# Altium PCB EP2C5T144C8.PcbDoc (part 2 of 2)
Units mm, origin at the board's own origin, x right, y up, seen from the top; angles counter-clockwise.
Board outline 85 x 80 mm, 2 copper layers (Top Layer, Bottom Layer); 74 components, 125 nets, 468 pads, 116 vias.
Unrouted connection lines stored in the file: 2.
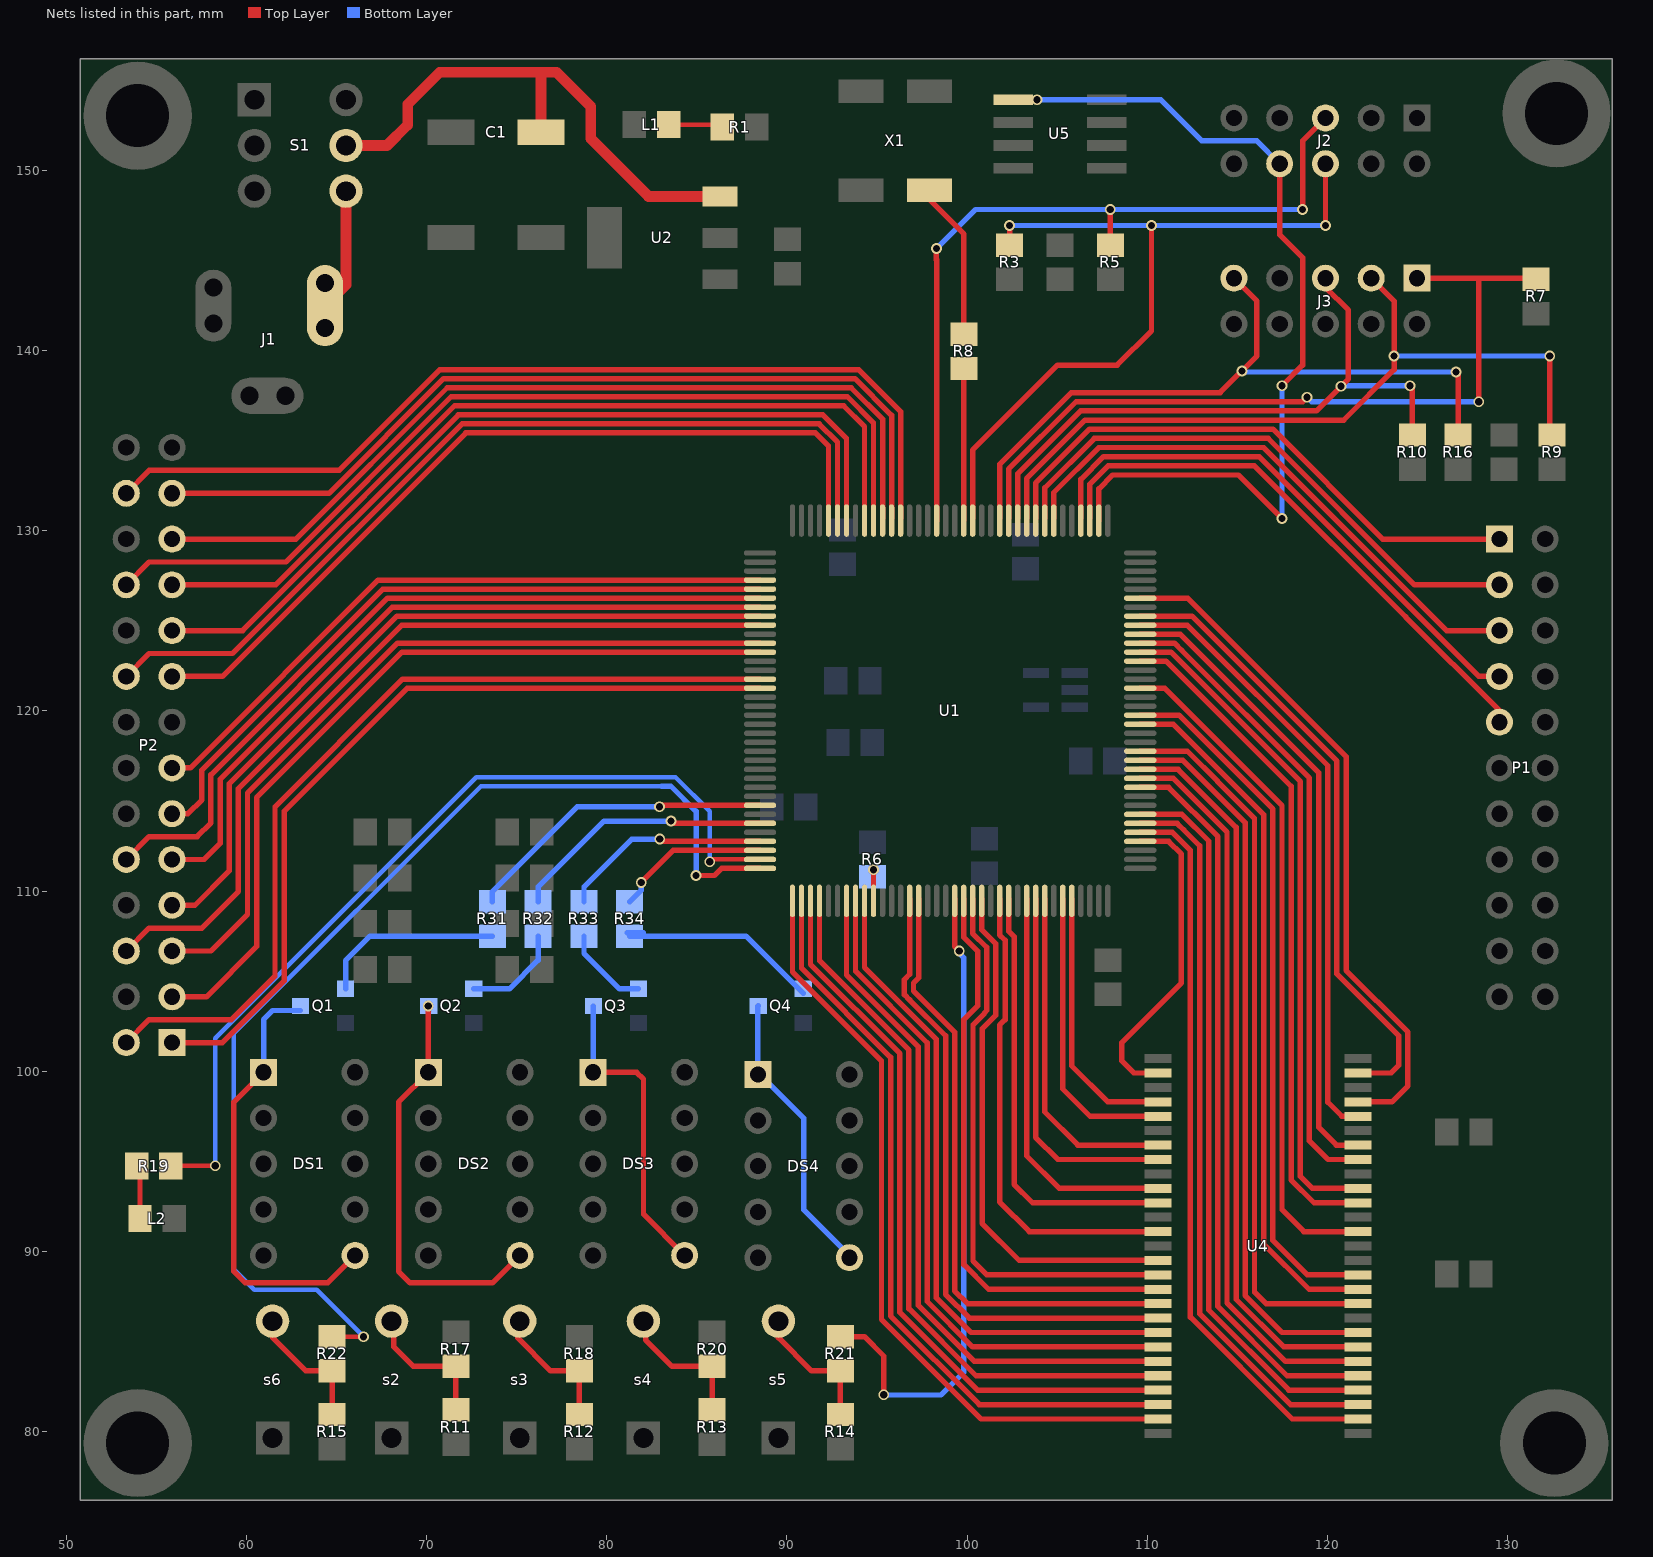
[diagram p2: the nets of this part, all layers, seen from the top]

## Via types
v1: diameter 0.6, hole 0.4, Top Layer to Bottom Layer, 68 vias
v2: diameter 0.8, hole 0.6, Top Layer to Bottom Layer, 35 vias
v3: diameter 1, hole 0.7, Top Layer to Bottom Layer, 4 vias
v4: diameter 2, hole 1.5, Top Layer to Bottom Layer, 3 vias
v5: diameter 0.7, hole 0.5, Top Layer to Bottom Layer, 3 vias
v6: diameter 1.27, hole 0.711, Top Layer to Bottom Layer, 1 vias
v7: diameter 0.8, hole 0.6, Top Layer to Bottom Layer, tented bottom, 1 vias
v8: diameter 1, hole 0.8, Top Layer to Bottom Layer, 1 vias

## Nets (pads, with @x,y where several pads share a name; then routed paths per layer and width w, separated by ;. In a path a pad name is that pad's centre, name@x,y a point inside that pad or via, vN(x,y) a via of type N, cw(c..) or ccw(c..) an arc to the next point about the centre after c; other vN are vias at no path point) (continued)
KEY4: R21.1 U1.91 | length 36.5
  Top Layer w0.3: R21.1@92.964,85.278 94.3,85.278 95.377,84.201 v1(95.377,82.057) ; U1.91@99.31,109.592 99.31,106.938 v1(99.568,106.68)
  Bottom Layer w0.3: v1(95.377,82.057) 95.392,82.042 98.552,82.042 99.822,83.312 99.822,106.299 99.568,106.553 v1(99.568,106.68)
KEY5: R22.1 U1.72 | length 62.8
  Top Layer w0.254: R22.1@64.77,85.278 v1(66.512,85.278)
  Top Layer w0.3: v1(84.963,110.871) 85.979,110.871 86.373,111.265 U1.72@88.51,111.265
  Bottom Layer w0.254: v1(66.512,85.278) 63.906,87.884 60.452,87.884 59.309,89.027 59.309,102.108 73.025,115.824 83.058,115.824
  Bottom Layer w0.3: 83.058,115.824 83.566,115.824 84.963,114.427 v1(84.963,110.871)
LED: R19.1 U1.71 | length 49.4
  Top Layer w0.254: R19.1@55.831,94.759 v1(58.276,94.759) ; v1(85.725,111.633) 85.857,111.765 U1.71@88.51,111.765
  Bottom Layer w0.254: v1(58.276,94.759) 58.276,101.837 72.771,116.332 83.82,116.332 85.725,114.427 v1(85.725,111.633)
NCE: J2.6 R3.1 U1.16 | length 44.3
  Top Layer w0.3: U1.16@100.31,130.692 100.31,134.473 105.029,139.192 108.331,139.192 110.236,141.097 v1(110.236,146.939) ; R3.1@102.362,145.857 v1(102.362,146.939) ; v1(119.888,146.939) J2.6@119.888,150.368
  Bottom Layer w0.3: v1(102.362,146.939) v1(119.888,146.939)
NCONFIG: J2.5 R5.1 U1.20 | length 43.9
  Top Layer w0.3: 98.298,145.034 98.298,145.657 v1(98.31,145.669) ; U1.20@98.31,130.565 98.31,145.034 ; R5.1@107.95,145.857 v1(107.95,147.828) ; v1(118.618,147.828) 118.618,151.638 J2.5@119.888,152.908
  Bottom Layer w0.3: v1(98.31,145.669) 100.469,147.828 v1(118.618,147.828)
NCS: J2.8 U1.2 U5.1 | length 50.2
  Top Layer w0.3: U5.1@102.556,153.924 v1(103.886,153.924) ; U1.2@107.31,130.565 107.31,132.329 108.077,133.096 115.062,133.096 v1(117.475,130.683) ; J2.8@117.348,150.368 117.348,146.431 118.618,145.161 118.618,139.192 v1(117.475,138.049)
  Bottom Layer w0.3: v1(103.886,153.924) 110.744,153.924 113.03,151.638 116.078,151.638 J2.8@117.348,150.368 ; v1(117.475,130.683) v1(117.475,138.049)
NetC1_1: C1.1 S1.5 U2.3@86.281,148.556 | length 29.8
  Top Layer w0.6: S1.5@66.04,151.384 67.818,151.384 68.961,152.527 68.961,153.67 70.739,155.448 77.216,155.448 79.121,153.543 79.121,151.765 82.33,148.556 U2.3@86.281,148.556 ; 76.327,155.448 76.363,155.412 C1.1@76.363,152.121
NetDS1_1: DS1.1 DS1.6 Q1.3 | length 24.5
  Top Layer w0.3: DS1.1@60.96,99.949 59.309,98.298 59.309,88.9 59.944,88.265 64.516,88.265 DS1.6@66.04,89.789
  Bottom Layer w0.3: DS1.1@60.96,99.949 60.96,102.87 61.468,103.378 Q1.3@63.012,103.378
NetDS2_1: DS2.1 DS2.6 Q2.3 | length 23.1
  Top Layer w0.3: v1(70.104,103.632) DS2.1@70.104,99.949 68.453,98.298 68.453,88.9 69.088,88.265 73.66,88.265 DS2.6@75.184,89.789
  Bottom Layer w0.3: Q2.3@70.104,103.358 Q2.3@70.124,103.378
NetDS3_1: DS3.1 DS3.6 Q3.3 | length 17.9
  Top Layer w0.3: DS3.1@79.248,99.949 81.661,99.949 82.042,99.568 82.042,92.075 DS3.6@84.328,89.789 DS3.6@83.812,89.789
  Bottom Layer w0.3: DS3.1@79.248,99.949 Q3.3@79.248,103.612
NetDS4_1: DS4.1 DS4.6 Q4.3 | length 16.1
  Bottom Layer w0.3: DS4.1@88.392,99.822 88.392,103.612 Q4.3@88.412,103.632 ; DS4.1@88.392,99.949 90.932,97.409 90.932,92.329 DS4.6@93.472,89.789
NetJ1_1: J1.1 J1.1A J1.1B S1.4 | length 6.8
  Top Layer w0.6: J1.1@64.373,142.494 65.532,143.653 S1.4@65.532,148.844
NetL1_2: L1.2 R1.2 | length 3
  Top Layer w0.254: L1.2@83.437,152.54 86.286,152.54 R1.2@86.426,152.4
NetL2_1: L2.1 R19.2 | length 3
  Top Layer w0.3: R19.2@53.914,94.742 54.104,94.551 L2.1@54.104,91.834
NetR8_1: R8.1 U1.17 | length 8.4
  Top Layer w0.3: U1.17@99.822,130.577 R8.1@99.822,139.004
NetR8_2: R8.2 X1.3 | length 9
  Top Layer w0.3: X1.3@97.404,148.888 99.822,146.47 R8.2@99.822,140.904
NetR11_2: R11.2 R17.2 s2.2 | length 7.7
  Top Layer w0.3: s2.2@68.193,86.138 68.193,84.715 69.276,83.632 R17.2@71.628,83.632 R11.2@71.628,81.214
NetR12_2: R12.2 R18.2 s3.2 | length 7.5
  Top Layer w0.3: s3.2@75.051,86.138 75.051,85.223 76.896,83.378 R18.2@78.486,83.378 R12.2@78.486,80.96
NetR13_2: R13.2 R20.2 s4.2 | length 7.8
  Top Layer w0.3: s4.2@82.163,86.138 82.163,85.096 83.627,83.632 R20.2@85.852,83.632 R13.2@85.852,81.214
NetR14_2: R14.2 R21.2 s5.2 | length 7.5
  Top Layer w0.3: s5.2@89.529,86.138 89.529,85.223 91.374,83.378 R21.2@92.964,83.378 R14.2@92.964,80.96
NetR15_2: R15.2 R22.2 s6.2 | length 7.4
  Top Layer w0.3: s6.2@61.462,86.138 61.462,85.223 63.307,83.378 R22.2@64.77,83.378 R15.2@64.77,80.96
NSTATUS: R6.1 U1.82 | length 1.6
  Top Layer w0.3: U1.82@94.81,109.592 v1(94.81,111.193)
P1: P2.13 U1.40 | length 36.9
  Top Layer w0.3: P2.13@55.88,116.84 56.896,116.84 67.321,127.265 U1.40@88.51,127.265
P2: P2.11 U1.41 | length 38.8
  Top Layer w0.3: P2.11@55.88,114.3 56.769,114.3 57.531,115.062 57.531,116.713 67.583,126.765 U1.41@88.51,126.765
P3: P2.10 U1.42 | length 42.7
  Top Layer w0.3: P2.10@53.34,111.76 54.61,113.03 57.277,113.03 58.039,113.792 58.039,116.459 67.845,126.265 U1.42@88.51,126.265
P4: P2.9 U1.43 | length 40.5
  Top Layer w0.3: P2.9@55.88,111.76 57.658,111.76 58.547,112.649 58.547,116.205 68.107,125.765 U1.43@88.51,125.765
P5: P2.7 U1.44 | length 42.1
  Top Layer w0.3: P2.7@55.88,109.22 57.15,109.22 59.055,111.125 59.055,115.951 68.369,125.265 U1.44@88.51,125.265
P6: P2.6 U1.45 | length 46
  Top Layer w0.3: P2.6@53.34,106.68 54.61,107.95 57.531,107.95 59.563,109.982 59.563,115.697 68.631,124.765 U1.45@88.51,124.765
P7: P2.5 U1.47 | length 43.6
  Top Layer w0.3: P2.5@55.88,106.68 58.039,106.68 60.071,108.712 60.071,115.443 68.393,123.765 U1.47@88.51,123.765
P8: P2.3 U1.48 | length 45.4
  Top Layer w0.3: P2.3@55.88,104.14 57.785,104.14 60.579,106.934 60.579,115.189 68.655,123.265 U1.48@88.51,123.265
P9: P2.2 U1.51 | length 49
  Top Layer w0.3: P2.2@53.34,101.6 54.61,102.87 59.182,102.87 61.595,105.283 61.595,114.681 68.679,121.765 U1.51@88.51,121.765
P10: P2.1 U1.52 | length 46.3
  Top Layer w0.3: P2.1@55.88,101.6 58.674,101.6 62.103,105.029 62.103,114.427 68.941,121.265 U1.52@88.51,121.265
PP3: P1.9 U1.3 | length 31.8
  Top Layer w0.3: U1.3@106.81,130.692 106.81,132.591 107.823,133.604 115.951,133.604 124.714,124.841 ; 124.335,125.22 129.54,120.015 P1.9@129.54,119.38
PP4: P1.7 U1.4 | length 31
  Top Layer w0.3: U1.4@106.31,130.692 106.31,132.599 106.31,132.853 107.569,134.112 116.205,134.112 128.397,121.92 P1.7@129.54,121.92
PP5: P1.5 U1.7 | length 31.4
  Top Layer w0.3: U1.7@104.81,130.692 104.81,132.115 107.315,134.62 116.459,134.62 116.459,134.612 126.611,124.46 P1.5@129.54,124.46
PP6: P1.3 U1.8 | length 31.4
  Top Layer w0.3: U1.8@104.31,130.692 104.31,132.377 107.061,135.128 116.713,135.128 124.841,127 P1.3@129.54,127
PP7: P1.1 U1.9 | length 31.4
  Top Layer w0.3: U1.9@103.81,130.692 103.81,132.639 106.807,135.636 116.967,135.636 123.063,129.54 P1.1@129.54,129.54
PP8: P2.26 U1.24 | length 52.7
  Top Layer w0.3: P2.26@53.34,132.08 54.61,133.35 65.151,133.35 70.739,138.938 93.98,138.938 96.31,136.608 U1.24@96.31,130.692
PP9: P2.25 U1.25 | length 49.1
  Top Layer w0.3: P2.25@55.88,132.08 64.588,132.08 70.946,138.438 93.773,138.438 95.81,136.401 U1.25@95.81,130.692
PP10: P2.23 U1.26 | length 49.1
  Top Layer w0.3: P2.23@55.88,129.54 62.755,129.54 71.153,137.938 93.566,137.938 95.31,136.194 U1.26@95.31,130.692
PP11: P2.22 U1.27 | length 51.7
  Top Layer w0.3: P2.22@53.34,127 54.61,128.27 62.192,128.27 71.36,137.438 93.359,137.438 94.81,135.987 U1.27@94.81,130.692
PP12: P2.21 U1.28 | length 48.1
  Top Layer w0.3: P2.21@55.88,127 61.629,127 71.567,136.938 93.152,136.938 94.31,135.78 U1.28@94.31,130.692
PP13: P2.19 U1.30 | length 47.4
  Top Layer w0.3: P2.19@55.88,124.46 59.797,124.46 71.775,136.438 92,136.438 93.31,135.128 U1.30@93.31,130.692
PP14: P2.18 U1.31 | length 49.9
  Top Layer w0.3: P2.18@53.34,121.92 54.61,123.19 59.234,123.19 71.982,135.938 91.793,135.938 92.81,134.921 U1.31@92.81,130.692
PP15: P2.17 U1.32 | length 46.4
  Top Layer w0.3: P2.17@55.88,121.92 58.671,121.92 72.189,135.438 91.586,135.438 92.31,134.714 U1.32@92.31,130.692
S_A0: U1.76 U4.23 | length 40.2
  Top Layer w0.3: U1.76@91.81,109.592 91.81,106.145 96.774,101.181 96.774,86.83 100.495,83.11 U4.23@110.604,83.11
S_A1: U1.75 U4.24 | length 41.1
  Top Layer w0.3: U1.75@91.31,109.592 91.31,105.938 96.266,100.982 96.266,86.631 100.588,82.31 U4.24@110.604,82.31
S_A2: U1.74 U4.25 | length 42.1
  Top Layer w0.3: U1.74@90.81,109.592 90.81,105.731 95.758,100.783 95.758,86.432 100.68,81.51 U4.25@110.604,81.51
S_A3: U1.73 U4.26 | length 43
  Top Layer w0.3: U1.73@90.31,109.592 90.31,105.524 95.25,100.584 95.25,86.233 100.773,80.71 U4.26@110.604,80.71
S_A4: U1.113 U4.29 | length 40.8
  Top Layer w0.3: U1.113@109.61,113.265 111.398,113.265 112.395,112.268 112.395,86.36 118.045,80.71 U4.29@121.704,80.71
S_A5: U1.114 U4.30 | length 40.7
  Top Layer w0.3: U1.114@109.61,113.765 111.66,113.765 112.024,113.401 112.903,112.522 112.903,86.559 117.952,81.51 U4.30@121.704,81.51
S_A6: U1.115 U4.31 | length 40.6
  Top Layer w0.3: U1.115@109.61,114.265 111.922,114.265 113.411,112.776 113.411,86.758 117.86,82.31 U4.31@121.704,82.31
S_A7: U1.118 U4.32 | length 40.9
  Top Layer w0.3: U1.118@109.61,115.765 111.184,115.765 113.919,113.03 113.919,86.957 117.767,83.11 U4.32@121.704,83.11
S_A8: U1.119 U4.33 | length 40.8
  Top Layer w0.3: U1.119@109.61,116.265 111.446,116.265 114.427,113.284 114.427,87.156 117.674,83.91 U4.33@121.704,83.91
S_A9: U1.120 U4.34 | length 40.7
  Top Layer w0.3: U1.120@109.61,116.765 111.708,116.765 114.935,113.538 114.935,87.356 117.581,84.71 U4.34@121.704,84.71
S_A10: U1.79 U4.22 | length 38.8
  Top Layer w0.3: U1.79@93.31,109.592 93.31,105.352 97.282,101.38 97.282,87.029 100.402,83.91 U4.22@110.604,83.91
S_A11: U1.121 U4.35 | length 40.6
  Top Layer w0.3: U1.121@109.61,117.265 111.97,117.265 115.443,113.792 115.443,109.982 115.435,109.974 115.435,87.563 117.488,85.51 U4.35@121.704,85.51
S_BA0: U1.81 U4.20 | length 36.9
  Top Layer w0.3: U1.81@94.31,109.592 94.31,105.767 98.298,101.779 98.298,87.428 100.216,85.51 U4.20@110.604,85.51
S_BA1: U1.80 U4.21 | length 37.9
  Top Layer w0.3: U1.80@93.81,109.592 93.81,105.56 97.79,101.58 97.79,87.229 100.309,84.71 U4.21@110.604,84.71
S_CKE: U1.122 U4.37 | length 40.2
  Top Layer w0.3: U1.122@109.61,117.765 112.232,117.765 113.919,116.078 113.919,116.07 115.951,114.038 115.951,87.754 116.595,87.11 U4.37@121.704,87.11
S_CLK: U1.125 U4.38 | length 39
  Top Layer w0.3: U1.125@109.61,119.265 111.439,119.265 116.459,114.245 116.459,90.424 118.973,87.91 U4.38@121.704,87.91
S_DB0: U1.112 U4.2 | length 17.7
  Top Layer w0.3: U1.112@109.61,112.765 111.191,112.765 111.895,112.061 111.895,104.91 108.585,101.6 108.585,100.584 109.259,99.91 U4.2@110.604,99.91
S_DB1: U1.104 U4.4 | length 14.9
  Top Layer w0.3: U1.104@105.81,109.592 105.81,100.311 107.811,98.31 U4.4@110.604,98.31
S_DB2: U1.103 U4.5 | length 16.5
  Top Layer w0.3: U1.103@105.31,109.592 105.31,99.033 106.833,97.51 U4.5@110.604,97.51
S_DB3: U1.101 U4.7 | length 18.9
  Top Layer w0.3: U1.101@104.31,109.592 104.31,97.747 106.147,95.91 U4.7@110.604,95.91
S_DB4: U1.100 U4.8 | length 20.6
  Top Layer w0.3: U1.100@103.81,109.592 103.81,96.342 105.042,95.11 U4.8@110.604,95.11
S_DB5: U1.99 U4.10 | length 22.3
  Top Layer w0.3: U1.99@103.31,109.592 103.31,95.318 105.118,93.51 U4.10@110.604,93.51
S_DB6: U1.97 U4.11 | length 24.4
  Top Layer w0.3: U1.97@102.31,109.592 102.31,107.782 102.616,107.476 102.616,93.726 103.632,92.71 U4.11@110.604,92.71
S_DB7: U1.96 U4.13 | length 26.6
  Top Layer w0.3: U1.96@101.81,109.592 101.81,107.575 102.108,107.277 102.108,102.87 101.81,102.572 101.81,92.754 103.454,91.11 U4.13@110.604,91.11
S_DB8: U1.129 U4.42 | length 37.7
  Top Layer w0.3: U1.129@109.61,121.265 110.963,121.265 117.475,114.753 117.475,92.329 118.694,91.11 U4.42@121.704,91.11
S_DB9: U1.132 U4.44 | length 37.3
  Top Layer w0.3: U1.132@109.61,122.765 111.042,122.765 117.983,115.824 117.983,93.98 119.253,92.71 U4.44@121.704,92.71
S_DB10: U1.133 U4.45 | length 37.2
  Top Layer w0.3: U1.133@109.61,123.265 111.304,123.265 118.491,116.078 118.491,94.179 119.16,93.51 U4.45@121.704,93.51
S_DB11: U1.134 U4.47 | length 35.8
  Top Layer w0.3: U1.134@109.61,123.765 111.511,123.765 111.914,123.362 118.999,116.277 118.999,96.139 120.028,95.11 U4.47@121.704,95.11
S_DB12: U1.135 U4.48 | length 35.4
  Top Layer w0.3: U1.135@109.61,124.265 111.828,124.265 119.507,116.586 119.507,96.901 120.498,95.91 U4.48@121.704,95.91
S_DB13: U1.136 U4.50 | length 34.3
  Top Layer w0.3: U1.136@109.61,124.765 112.217,124.765 120.015,116.967 120.015,98.298 120.803,97.51 U4.50@121.704,97.51
S_DB14: U1.139 U4.51 | length 37.9
  Top Layer w0.3: U1.139@109.61,126.265 112.241,126.265 112.844,125.662 121.031,117.475 121.031,105.609 124.46,102.18 124.46,99.187 123.583,98.31 U4.51@121.704,98.31
S_DB15: U1.137 U4.53 | length 35
  Top Layer w0.3: U1.137@109.61,125.265 112.479,125.265 120.523,117.221 120.523,105.41 123.952,101.981 123.952,100.33 123.532,99.91 U4.53@121.704,99.91
S_LDQM: U1.94 U4.15 | length 29.3
  Top Layer w0.3: U1.94@100.81,109.592 100.81,107.868 101.6,107.078 101.6,103.124 100.838,102.362 100.838,91.567 102.895,89.51 U4.15@110.604,89.51
S_NCAS: U1.92 U4.17 | length 32.3
  Top Layer w0.3: U1.92@99.81,109.592 99.81,107.454 100.584,106.68 100.584,103.632 99.822,102.87 99.822,102.489 99.822,89.281 101.193,87.91 U4.17@110.604,87.91
S_NCS: U1.86 U4.19 | length 35.4
  Top Layer w0.3: U1.86@96.81,109.592 96.81,105.391 96.52,105.101 96.52,104.264 96.81,103.974 98.806,101.978 98.806,87.627 100.123,86.31 U4.19@110.604,86.31
S_NRAS: U1.87 U4.18 | length 34.4
  Top Layer w0.3: U1.87@97.31,109.592 97.31,105.184 97.028,104.902 97.028,104.463 97.31,104.181 99.314,102.177 99.314,87.826 100.03,87.11 U4.18@110.604,87.11
S_NWE: U1.93 U4.16 | length 31.3
  Top Layer w0.3: U1.93@100.31,109.592 100.31,107.661 101.092,106.879 101.092,103.378 100.965,103.251 100.965,103.213 100.33,102.578 100.33,89.48 101.1,88.71 U4.16@110.604,88.71
S_UDQM: U1.126 U4.39 | length 39
  Top Layer w0.3: U1.126@109.61,119.765 111.756,119.765 116.967,114.554 116.967,90.623 118.88,88.71 U4.39@121.704,88.71
SEG1: Q1.1 R31.2 | length 10.3
  Bottom Layer w0.3: Q1.1@65.512,104.582 65.512,106.152 66.868,107.508 R31.2@73.66,107.508
SEG1_B: R31.1 U1.65 | length 17.4
  Top Layer w0.3: v1(82.931,114.681) 83.015,114.765 U1.65@88.51,114.765
  Bottom Layer w0.3: R31.1@73.66,109.408 73.66,109.982 78.359,114.681 v1(82.931,114.681)
SEG2: Q2.1 R32.2 | length 5.6
  Bottom Layer w0.3: Q2.1@72.624,104.582 74.61,104.582 76.2,106.172 R32.2@76.2,107.508
SEG2_B: R32.1 U1.67 | length 14.7
  Top Layer w0.3: v1(83.566,113.892) 83.693,113.765 U1.67@88.51,113.765
  Bottom Layer w0.3: R32.1@76.2,109.408 76.2,110.236 79.856,113.892 v1(83.566,113.892)
SEG3: Q3.1 R33.2 | length 4.8
  Bottom Layer w0.3: R33.2@78.74,107.508 78.74,106.553 80.711,104.582 Q3.1@81.768,104.582
SEG3_B: R33.1 U1.69 | length 11.6
  Top Layer w0.3: v1@83.069,112.765 U1.69@88.51,112.765
  Bottom Layer w0.3: R33.1@78.74,109.408 78.74,110.236 81.396,112.892 v1(82.942,112.892)
SEG4: Q4.1 R34.2 | length 11.8
  Bottom Layer w0.3: R34.2@81.153,107.696 81.28,107.696 82.042,107.696 ; R34.2@81.28,107.508 87.732,107.508 Q4.1@90.912,104.328
SEG4_B: R34.1 U1.70 | length 8.7
  Top Layer w0.3: v1(81.915,110.49) 83.69,112.265 U1.70@88.51,112.265
  Bottom Layer w0.3: R34.1@81.28,109.408 81.915,110.043 v1(81.915,110.49)
TCK: J3.1 R7.1 U1.12 | length 44.1
  Top Layer w0.3: U1.12@102.31,130.692 102.31,133.425 106.045,137.16 118.618,137.16 v1(118.872,137.414) ; J3.1@124.968,144.018 131.506,144.018 R7.1@131.572,143.952 ; v1(128.397,137.16) 128.397,144.018
  Bottom Layer w0.3: v1(118.872,137.414) 119.126,137.16 v1(128.397,137.16)
TDI: J3.9 R16.1 U1.13 | length 40
  Top Layer w0.3: U1.13@101.81,130.692 101.81,133.687 105.791,137.668 114.046,137.668 116.078,139.7 116.078,142.748 J3.9@114.808,144.018 ; v1(127.127,138.811) 127.254,138.684 R16.1@127.254,135.316
  Bottom Layer w0.3: v1(115.252,138.874) 115.315,138.811 v1(127.127,138.811)
TDO: J3.3 R9.1 U1.10 | length 43.8
  Top Layer w0.3: U1.10@103.31,130.692 103.31,132.901 106.553,136.144 120.904,136.144 123.698,138.938 123.698,142.748 J3.3@122.428,144.018 ; v1(132.334,139.7) 132.334,135.443 R9.1@132.461,135.316
  Bottom Layer w0.3: v1(123.698,139.7) v1(132.334,139.7)
TMS: J3.5 R10.1 U1.11 | length 35.8
  Top Layer w0.3: U1.11@102.81,130.692 102.81,133.163 106.299,136.652 119.38,136.652 121.158,138.43 121.158,142.24 119.888,143.51 J3.5@119.888,144.018 ; v1(124.587,138.049) 124.714,137.922 R10.1@124.714,135.316
  Bottom Layer w0.3: v1(120.744,138.016) 120.777,138.049 v1(124.587,138.049)
pads on no net: J3.7 J3.8 S1.1 S1.2 S1.3 S1.6 U3.4 U4.36 U4.40 X1.1

## Polygon pours and split planes (outlines as drawn)
DGND on Top Layer "Top Layer-No Net" (solid, pour order 1012): 106.81,110.998 106.31,110.998 106.31,111.517 106.752,111.517 106.801,111.468 106.81,111.459 106.81,110.998
DGND on Top Layer "Top Layer-No Net" (solid, pour order 1011): 108.077,111.765 108.077,112.345 108.106,112.374 107.958,112.522 106.807,112.522 106.807,111.763 106.81,111.76 106.815,111.765 108.077,111.765
DGND on Top Layer "Top Layer-No Net" (solid, pour order 1010): 91.111,116.765 90.043,116.765 90.043,117.946 90.004,117.984 90.133,117.856 92.202,117.856 92.202,116.84 92.075,116.713 92.023,116.765 91.111,116.765
DGND on Top Layer "Top Layer-No Net" (solid, pour order 1009): 104.267,121.158 104.452,121.343 104.452,121.636 104.452,121.724 104.62,121.892 105.283,121.892 105.283,121.285 105.156,121.158
DGND on Top Layer "Top Layer-No Net" (solid, pour order 1008): 107.988,120.892 107.988,121.854 107.95,121.892 104.62,121.892 104.62,121.186 104.648,121.158 107.722,121.158 107.988,120.892
DGND on Top Layer "Top Layer-No Net" (solid, pour order 1007): 107.95,111.892 107.95,112.392 107.185,112.392 107.188,112.389 107.188,111.892 107.95,111.892
DGND on Top Layer "Top Layer-No Net" (solid, pour order 1006): 107.823,117.729 107.823,118.392 103.152,118.392 102.823,118.063 103.283,117.602 103.632,117.602 107.696,117.602 107.823,117.729
DGND on Top Layer "Top Layer-No Net" (solid, pour order 1005): 107.823,117.729 107.823,115.392 107.239,115.392 106.412,116.219 106.412,117.461 106.553,117.602 106.68,117.729 107.823,117.729
DGND on Top Layer "Top Layer-No Net" (solid, pour order 1004): 104.902,127.381 105.029,127.508 105.029,128.905 103.091,128.905 102.81,129.186 103.124,128.872 103.124,127.254 104.775,127.254 104.902,127.381
DGND on Top Layer "Top Layer-No Net" (solid, pour order 1003): 99.183,129.202 97.533,129.202 97.506,129.229 97.536,129.199 97.536,127.381 98.933,127.381 99.06,127.508 99.06,129.234 98.096,129.234 98.044,129.286
DGND on Top Layer "Top Layer-No Net" (solid, pour order 1002): 93.897,115.868 93.853,115.912 93.853,117.983 96.647,117.983 96.511,117.847 96.511,115.561 93.971,115.561 93.853,115.443 93.897,115.487 93.897,115.868
DGND on Top Layer "Top Layer-No Net" (solid, pour order 1001): 97.917,111.506 100.33,111.506 100.33,112.014 100.33,112.141 99.822,112.649 99.568,112.903 98.552,112.903 97.79,112.141 97.917,112.014 97.917,111.506
DGND on Top Layer "Top Layer-No Net" (solid, pour order 1000): 90.043,129.159 89.916,129.032 89.916,110.998 108.204,110.998 108.331,111.125 108.331,129.286 89.916,129.286 89.789,129.159
DGND on Bottom Layer "Top Layer-No Net" (solid, pour order 1010): 91.948,110.871 89.916,112.903 89.916,113.157 89.535,113.157 88.265,111.887 88.138,111.76 88.138,109.982 91.059,109.982 91.948,110.871
DGND on Bottom Layer "Top Layer-No Net" (solid, pour order 1009): 89.789,125.222 89.916,125.222 91.44,126.746 91.334,126.852 91.334,127.121 91.319,127.121 90.424,128.016 89.281,126.873 89.281,125.73 89.789,125.222
DGND on Bottom Layer "Top Layer-No Net" (solid, pour order 1008): 91.44,127.381 91.44,130.302 91.439,130.303 91.184,130.048 90.043,130.048 90.043,128.27 90.678,127.635 90.932,127.381 91.44,127.381
DGND on Bottom Layer "Top Layer-No Net" (solid, pour order 1007): 130.429,141.732 133.477,141.732 133.35,141.605 133.35,140.716 129.667,140.716 129.413,140.97 130.175,141.732 130.429,141.732
DGND on Bottom Layer "Top Layer-No Net" (solid, pour order 1006): 103.676,148.922 103.598,148.844 101.092,148.844 101.092,150.241 101.219,150.368 101.346,150.495 103.251,150.495 103.251,150.368 103.886,149.733 103.674,149.521 103.674,148.905
DGND on Bottom Layer "Top Layer-No Net" (solid, pour order 1005): 99.314,144.907 99.314,142.494 102.362,142.494 102.87,143.002 102.743,143.129 102.743,145.161 99.568,145.161 99.314,144.907
DGND on Bottom Layer "Top Layer-No Net" (solid, pour order 1004): 120.904,82.423 120.904,77.724 126.492,77.724 125.603,78.613 125.603,82.55 121.031,82.55 120.904,82.423
DGND on Bottom Layer "Top Layer-No Net" (solid, pour order 1003): 54.864,146.177 54.864,139.319 57.404,136.779 58.674,135.509 64.643,135.509 64.643,137.922 62.357,140.208 61.087,141.478 61.087,146.177 54.864,146.177
DGND on Bottom Layer "Top Layer-No Net" (solid, pour order 1002): 79.756,155.194 96.52,155.194 96.647,155.067 96.647,138.43 79.883,138.43 79.756,138.557 79.756,155.194
DGND on Bottom Layer "Top Layer-No Net" (solid, pour order 1001): 104.394,106.807 104.775,106.426 104.775,86.487 132.842,86.487 133.35,86.995 133.35,100.203 125.73,100.203 124.587,101.346 119.126,106.807 104.394,106.807
DGND on Bottom Layer "Top Layer-No Net" (solid, remove dead copper, pour order 1000): 50.8,156.083 50.673,155.956 50.673,130.683 50.673,76.327 50.8,76.2 50.927,76.327 135.89,76.327 135.89,156.21 135.763,156.083 50.8,156.083
DGND on Bottom Layer "Top Layer-No Net" (solid, pour order 1030): 94.021,116.009 93.98,116.05 93.98,116.967 95.922,116.967 95.99,116.9 96.139,116.75 96.139,115.697 94.107,115.697 93.853,115.443 93.991,115.581 93.991,116.048
DGND on Bottom Layer "Top Layer-No Net" (solid, pour order 1029): 105.989,126.998 106.312,126.998 107.569,125.741 107.95,125.36 107.95,125.095 107.95,125.73 109.855,127.635 108.712,128.778 106.172,128.778 106.172,127.31 105.925,127.063
DGND on Bottom Layer "Top Layer-No Net" (solid, pour order 1028): 106.172,127.254 107.569,125.857 107.569,125.476 107.696,125.476 108.966,126.746 108.712,127 108.712,128.397 107.188,128.397 106.807,128.778 106.172,128.143 106.172,127.254
DGND on Bottom Layer "Top Layer-No Net" (solid, pour order 1027): 105.029,130.429 105.029,127.508 106.101,127.508 106.2,127.607 106.172,127.635 106.172,130.556 105.156,130.556 105.029,130.429
DGND on Bottom Layer "Top Layer-No Net" (solid, pour order 1023): 53.848,91.567 54.102,91.313 54.102,88.011 57.785,88.011 57.912,88.138 57.912,92.202 53.975,92.202 53.721,91.948
DGND on Bottom Layer "Top Layer-No Net" (solid, pour order 1016): 96.139,130.556 96.393,130.302 96.393,127.762 99.187,127.762 99.314,127.889 99.441,128.016 99.441,130.556 96.139,130.556
DGND on Bottom Layer "Top Layer-No Net" (solid, pour order 1015): 84.836,130.429 84.455,130.048 84.455,125.857 88.773,125.857 89.027,126.111 88.9,126.238 88.9,130.556 84.963,130.556 84.836,130.429
DGND on Bottom Layer "Top Layer-No Net" (solid, pour order 1014): 88.646,134.874 88.773,134.747 88.773,131.191 91.44,131.191 91.948,131.699 92.202,131.953 92.202,133.985 88.646,133.985 88.519,133.858
DGND on Bottom Layer "Top Layer-No Net" (solid, remove dead copper, pour order 1000): 99.187,109.982 99.187,111.506 97.663,111.506 97.663,109.982 99.187,109.982
DGND on Bottom Layer "Top Layer-No Net" (solid, remove dead copper, pour order 1001): 86.106,128.905 86.106,127.635 87.249,127.635 87.249,128.905 86.106,128.905
DGND on Bottom Layer "Top Layer-No Net" (solid, remove dead copper, pour order 1002): 85.754,128.944 85.89,128.808 85.89,127.409 87.856,127.409 87.884,127.381 88.011,127.508 88.011,128.905 85.793,128.905 85.754,128.944
DGND on Bottom Layer "Top Layer-No Net" (solid, remove dead copper, pour order 1003): 85.89,129.121 85.979,129.032 85.979,127.127 88.011,127.127 88.138,127.254 88.138,129.159 85.928,129.159 85.89,129.121
DGND on Bottom Layer "Top Layer-No Net" (solid, remove dead copper, pour order 1004): 91.44,126.746 91.528,126.834 91.528,130.405 90.4,130.405 90.043,130.048 90.043,127.889 91.186,126.746 91.44,126.746

## Keep-outs
Keep-Out Layer:
  lines w0.254: 50.673,83.566 50.673,77.373 ccw(c51.943,77.373) 51.943,76.103 55.372,76.103 ; 50.673,149.606 50.673,155.067 cw(c51.943,155.067) 51.943,156.337 55.753,156.337 ; 129.794,156.337 134.62,156.337 cw(c134.62,155.067) 135.89,155.067 135.89,151.638 ; 131.445,76.103 134.62,76.103 ccw(c134.62,77.373) 135.89,77.373 135.89,81.28
  lines w0.3: 50.673,77.286 50.673,154.686 ; 52.1,76.103 134.5,76.103 ; 52.347,156.337 134.747,156.337 ; 135.89,77.54 135.89,154.94

## Other copper
Top Layer:
  text "SCNU 2011" at 73.025,132.08 h1.52

## Silkscreen, mask and mechanical layers (free items; w line width, h text height)
Top Overlay:
  lines w0.254: 54.61,97.917 54.61,99.822 52.07,99.822 ; 57.658,105.41 62.103,105.41 62.103,107.95 57.658,107.95 57.658,110.49 62.103,110.49 62.103,113.03 57.658,113.03 ; 57.658,120.523 57.658,123.19 62.103,123.19 62.103,125.73 57.658,125.73 ; 57.658,120.65 62.103,120.65 62.103,118.11 57.658,118.11 57.658,115.57 62.103,115.57 ; 57.658,128.27 62.103,128.27 ; 57.658,130.81 62.103,130.81 ; 57.658,133.35 61.849,133.35 ; 57.658,135.763 62.103,135.763 ; 59.69,103.251 59.817,103.251 59.817,136.017 57.658,136.017 ; 66.167,143.637 68.707,143.637 ; 67.31,141.859 67.31,145.542 ; 117.348,145.415 117.348,146.812 122.428,146.812 ; 117.348,154.178 117.348,155.829 122.555,155.829 122.555,154.178 ; 122.555,145.415 122.555,146.812 ; 123.571,107.95 127.762,107.95 ; 123.571,110.49 127.762,110.49 ; 123.571,113.03 127.762,113.03 ; 123.571,115.57 127.762,115.57 ; 123.571,118.11 127.762,118.11 ; 123.571,120.65 127.762,120.65 ; 123.571,123.19 127.762,123.19 ; 123.571,125.73 127.762,125.73 ; 123.571,128.27 127.762,128.27 ; 123.571,130.429 127.762,130.429 ; 123.698,103.251 127.762,103.251 ; 123.698,105.41 127.762,105.41 ; 125.603,130.683 125.73,130.683 125.73,102.997 ; 127.762,102.997 123.571,102.997 123.571,108.966 123.571,130.683 127.762,130.683 ; 128.016,102.997 128.016,130.683 ; 52.07,99.822 52.07,97.917 57.277,97.917 57.277,99.822 52.07,99.822 ; 57.658,103.251 57.658,103.632 57.658,102.997 62.103,102.997 62.103,103.251 ; 57.658,103.251 62.103,103.251 ; 57.658,103.251 62.103,103.251 ; 57.658,103.251 57.658,136.017 ; 57.658,136.017 62.103,136.017 62.103,103.251
  text "AS" at 113.068,154.851 h1.25
  text "+" at 80.899,154.178 h1.52
  text "JTAG" at 108.839,135.636 h1.25
  text "GND" at 57.912,134.112 h0.6
  text "3V3" at 60.198,134.112 h0.6
  text "24" at 58.293,131.699 h0.7
  text "25" at 60.452,131.699 h0.7
  text "GND" at 57.912,129.159 h0.6
  text "26" at 60.452,129.159 h0.7
  text "9" at 124.333,129.032 h0.7
  text "GND" at 125.984,128.905 h0.6
  text "27" at 58.293,126.619 h0.7
  text "28" at 60.325,126.619 h0.7
  text "8" at 124.46,126.619 h0.7
  text "GND" at 125.984,126.619 h0.6
  text "GND" at 57.912,124.079 h0.6
  text "30" at 60.452,124.079 h0.6
  text "7" at 124.587,124.079 h0.7
  text "GND" at 125.984,123.952 h0.6
  text "31" at 58.293,121.539 h0.7
  text "32" at 60.452,121.539 h0.7
  text "GND" at 125.984,121.539 h0.6
  text "4" at 124.46,121.412 h0.8
  text "GND" at 57.912,118.999 h0.6
  text "GND" at 60.198,118.999 h0.6
  text "GND" at 125.984,118.999 h0.6
  text "3" at 124.46,118.872 h0.8
  text "GND" at 57.912,116.586 h0.6
  text "40" at 60.452,116.459 h0.7
  text "GND" at 123.825,116.459 h0.6
  text "GND" at 125.984,116.459 h0.6
  text "GND" at 57.912,113.919 h0.6
  text "41" at 60.579,113.919 h0.7
  text "GND" at 123.825,113.792 h0.6
  text "GND" at 125.984,113.792 h0.6
  text "42" at 58.166,111.379 h0.7
  text "43" at 60.452,111.379 h0.7
  text "GND" at 125.984,111.379 h0.6
  text "144" at 123.825,111.252 h0.7
  text "GND" at 57.912,108.839 h0.6
  text "44" at 60.452,108.839 h0.7
  text "143" at 123.825,108.839 h0.7
  text "GND" at 125.984,108.839 h0.6
  text "GND" at 125.984,106.426 h0.6
  text "45" at 58.166,106.299 h0.7
  text "47" at 60.579,106.299 h0.7
  text "142" at 123.952,106.299 h0.7
  text "GND" at 57.912,104.013 h0.7
  text "141" at 123.952,104.013 h0.7
  text "GND" at 125.984,104.013 h0.6
  text "48" at 60.452,103.886 h0.7
  text "51" at 52.959,98.425 h0.8
  text "52" at 55.245,98.425 h0.8
  text "+" at 53.213,89.154 h1.52